# Altium PCB FPGA_Board.PcbDoc (part 2 of 10)
Units mm, origin at the board's own origin, x right, y up, seen from the top; angles counter-clockwise.
Board outline 103.63 x 86.08 mm, 2 copper layers (Top Layer, Bottom Layer); 109 components, 200 nets, 667 pads, 237 vias.
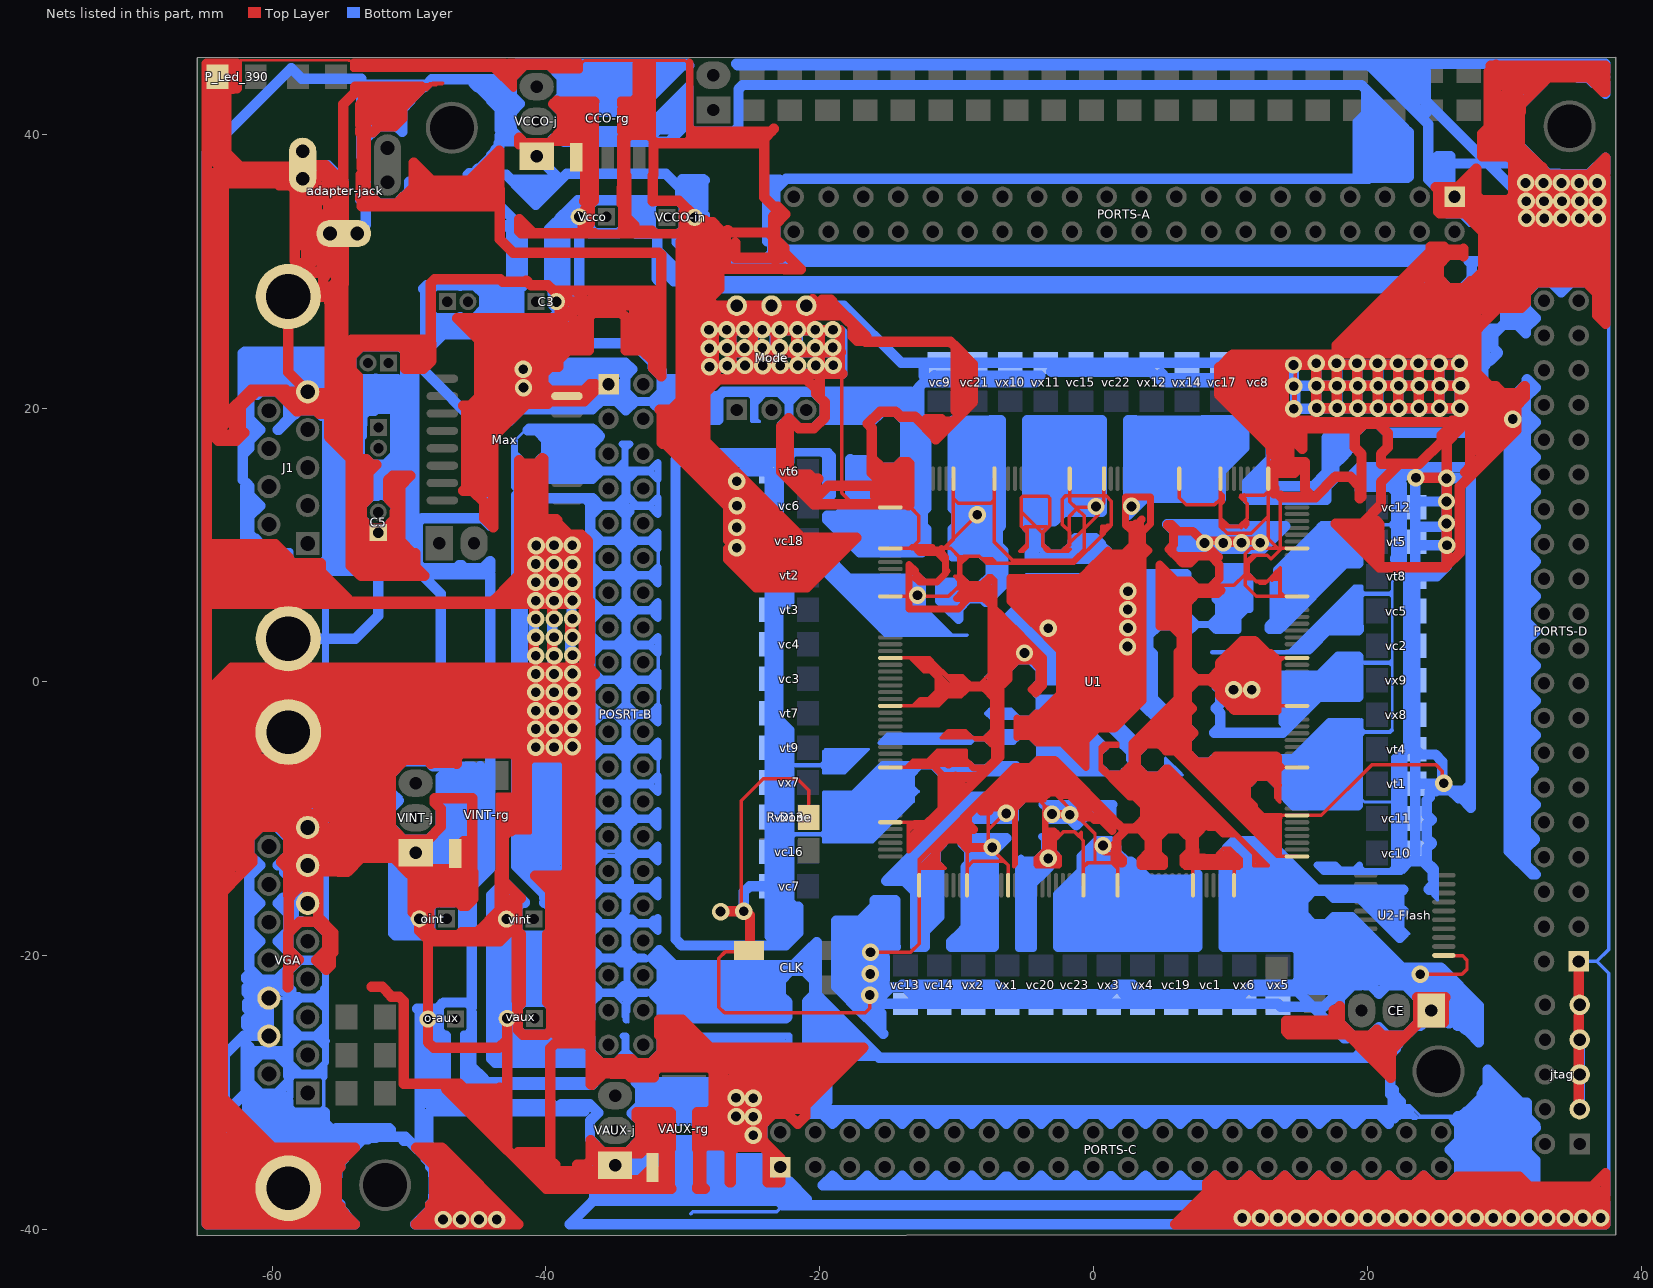
[diagram p2: the nets of this part, all layers, seen from the top]

## Via types
v1: diameter 1.27, hole 0.711, Top Layer to Bottom Layer, 237 vias

## Nets (pads, with @x,y where several pads share a name; then routed paths per layer and width w, separated by ;. In a path a pad name is that pad's centre, name@x,y a point inside that pad or via, vN(x,y) a via of type N, cw(c..) or ccw(c..) an arc to the next point about the centre after c; other vN are vias at no path point) (continued)
GND: adapter-jack.2 adapter-jack.2A adapter-jack.2B adapter-jack.3 adapter-jack.3A adapter-jack.3B C3.2 C5.1 CCO-rg.1 CE.1 CLK.2 J1.5 J1.10 J1.11 jtag.3 jtag.5 jtag.7 jtag.9 Max.15 Mode.4 Mode.5 Mode.6 o-aux.2 oint.2 P_Led_390.2 PORTS-A.1 PORTS-C.1 PORTS-D.1 POSRT-B.1 R-Done.2 U1.1 U1.8 U1.14 U1.25 U1.30 U1.41 U1.47 U1.53 U1.59 U1.66 U1.75 U1.82 U1.91 U1.99 U1.105 U1.112 U1.118 U1.129 U1.134 U1.145 U1.151 U1.157 U1.163 U1.170 U1.179 U1.186 U1.195 U1.202 U2-Flash.11 VAUX-j.1 VAUX-rg.1 vaux.2 vc1.2 vc2.2 vc3.2 vc4.2 vc5.2 vc6.2 vc7.2 vc8.2 vc9.2 vc10.2 vc11.2 vc12.2 vc13.2 vc14.2 vc15.2 vc16.2 vc17.2 vc18.2 vc19.2 vc20.2 vc21.2 vc22.2 vc23.2 VCCO-in.2 VCCO-j.1 Vcco.2 VGA.6 VGA.7 VGA.8 VGA.10 VGA.11 VGA.16 VGA.17 VINT-j.1 VINT-rg.1 vint.2 vt1.1 vt2.1 vt3.1 vt4.1 vt5.1 vt6.1 vt7.1 vt8.1 vt9.1 vx1.1 vx2.1 vx3.1 vx4.1 vx5.1 vx6.1 vx7.1 vx8.1 vx9.1 vx10.1 vx11.1 vx12.1 vx13.1 vx14.1 | length 14138.7
  Top Layer w0.203: -62.584,45.079 -62.258,45.405 -54.399,45.405 -54.365,45.372 -52.969,45.372 -52.863,45.266 -52.813,45.217 -52.782,45.185 ; -52.845,45.185 -52.782,45.185 ; -52.634,45.037 -52.782,45.185 ; -29.587,40.634 -29.516,40.705 -29.5,40.721 -29.479,40.721 -29.327,40.721 -29.327,44.109 -29.479,44.261 -29.516,44.298 -29.668,44.45 -29.668,45.213 -29.847,45.392 -37.193,45.392 -37.4,45.185 -37.536,45.185 -37.616,45.185 -37.914,45.185 -39.475,45.185 -41.921,45.185 -42.279,45.185 -42.36,45.185 -42.659,45.185 -42.975,45.185 -52.595,45.185 -52.782,45.185
  Top Layer w0.254: -64,39.475 -63.362,38.837 -62.4,37.875 -57.9,37.875 adapter-jack.2@-57.775,37.75 ; -48.716,43.26 -48.277,43.698 ; -48.688,43.489 -48.478,43.698 -48.277,43.698 ; -48.191,43.616 -48.01,43.616 -47.927,43.698 ; -41.095,-5.769 -41.13,-5.804 -41.13,-11.026 ; C3.2@-39.235,27.775 -39.235,26.566 -39.235,26.07 -39.235,25.899 -39.76,25.374 -40.458,24.676 -40.458,21.261 -40.458,21.225 -40.108,20.875 Max.15@-38.471,20.875 -37.257,20.875 -36.906,21.226 -36.382,21.75 POSRT-B.1@-35.429,21.75 ; -37.957,-6.219 -38.427,-6.219 -38.438,-6.208 -39.057,-5.589 -41.124,-5.589 -41.612,-5.589 -42.466,-5.589 -42.402,-5.653 -42.402,-10.218 -42.402,-10.753 ; Vcco.2@-37.575,33.975 -37.575,32.993 -37.361,32.779 -37.107,32.525 -29.667,32.525 -29.151,33.041 ; PORTS-C.1@-22.882,-35.435 -22.882,-35.229 -22.882,-35.07 -23.798,-34.154 -24.567,-33.385 -24.567,-31.918 -24.567,-31.704 -24.567,-31.163 -24.567,-30.992 -24.567,-30.864 -24.567,-30.479 -24.567,-29.981 -24.51,-29.924 -24.083,-29.497 -23.598,-29.012 -23.427,-28.841 -22.858,-28.272 -22.722,-28.136 -22.715,-28.129 ; R-Done.2@-20.805,-9.9 -20.805,-7.925 -21.649,-7.081 -24.119,-7.081 -25.732,-8.693 -25.732,-16.563 v1(-25.546,-16.749) -25.175,-17.12 CLK.2@-25.175,-19.625 -25.275,-19.725 -26.925,-19.725 -27.375,-20.175 -27.375,-23.75 -26.961,-24.164 -16.675,-24.164 -16.35,-23.839 v1(-16.35,-22.875) ; v1@-18.997,23.129 -18.997,23.122 -18.525,22.65 -18.375,22.5 -18.4,22.475 -18.4,14.323 -18.4,13.8 -17.561,12.961 -17.35,12.75 U1.53@-14.847,12.75 -13.375,12.75 -12.775,12.15 -12.775,10.3 -13.225,9.85 -13.225,9.834 -13.225,9.75 ; v1(-16.3,-19.75) -13.375,-19.75 -12.747,-19.122 U1.105@-12.747,-14.85 -12.727,-14.83 -12.727,-13.665 ; U1.99@-14.847,-10.25 -13.473,-10.25 ; U1.91@-14.847,-6.25 -13.729,-6.25 ; U1.82@-14.847,-1.75 -13.205,-1.75 ; U1.75@-14.847,1.75 -13.394,1.75 ; U1.66@-14.847,6.25 -13.49,6.25 -12.955,6.25 -10.6,6.25 -10.047,6.803 ; U1.59@-14.847,9.75 -13.375,9.75 -13.225,9.75 ; -12.886,9.457 -13.178,9.75 ; -11.742,-10.119 -11.873,-10.25 ; -10.698,-9.075 -10.823,-8.949 -10.823,-6.7 ; U1.47@-10.247,14.85 -10.247,13.397 ; -9.822,-7.07 -9.452,-6.7 ; -9.804,-5.955 -9.9,-5.859 -9.9,-5.707 ; -9.652,-7.501 -9.221,-7.07 -9.142,-6.991 -9.142,-6.7 ; -9.302,-5.005 -9.404,-5.005 ; -9.29,-5.005 -9.29,-5.17 ; U1.112@-9.247,-14.85 -9.247,-13.522 ; -9.189,-12.211 -9.758,-11.642 -11.424,-11.642 ; -8.975,-0.394 -9.357,-0.776 ; -8.886,-6.183 -9.115,-5.955 -9.29,-5.779 ; -8.558,-6.292 -8.685,-6.165 -8.725,-6.165 -9.29,-5.6 ; v1(-8.494,12.208) -10.247,10.455 ; -8.324,-6.209 -7.789,-6.209 -7.586,-6.209 -7.584,-6.209 ; -7.69,-4.2 -7.778,-4.112 ; -7.615,5.677 -7.618,5.674 -7.618,0.567 ; -7.479,-4.412 -7.656,-4.235 -7.9,-4.235 ; -7.46,-3.443 -7.46,-3.525 -8.025,-4.09 -8.825,-4.09 -9.152,-3.763 ; U1.41@-7.247,14.85 -7.247,13.625 -7.275,13.597 -7.275,13.275 ; -7.011,-5.937 -11.025,-9.95 ; -6.656,4.96 -7.15,5.453 ; v1(-6.387,-9.607) -6.504,-9.607 -7.7,-10.803 ; U1.118@-6.247,-14.85 -6.247,-13.403 -6.55,-13.1 ; -3.581,-8.677 -3.589,-8.685 -3.945,-8.685 ; v1@-3.333,-9.297 -3.618,-9.012 ; U1.30@-1.747,14.85 -1.747,13.586 ; U1.129@-0.747,-14.85 -0.747,-13.522 ; v1(0.174,12.808) 0.174,12.955 0.331,13.112 v1@0.331,12.75 ; v1(0.68,-11.954) 0.68,-12.465 0.756,-12.541 1.35,-12.541 ; U1.25@0.753,14.85 0.753,13.586 ; 1.326,-6.898 1.119,-6.898 ; 1.361,-7.314 0.945,-6.898 ; U1.134@1.753,-14.85 1.753,-13.628 1.35,-13.225 ; 2.167,-6.373 1.925,-6.615 1.125,-6.615 0.675,-6.165 ; 5.688,7.671 5.957,7.671 6.061,7.568 7.117,7.568 7.635,7.05 7.725,7.05 ; 6.145,-1.534 6.107,-1.496 6.107,-1.218 6.112,-1.218 6.145,-1.218 6.157,-1.218 6.475,-0.9 ; U1.14@6.253,14.85 6.253,13.447 6.775,12.925 8.825,12.925 9.253,13.353 ; 6.387,-13.36 6.387,-13.22 ; U1.145@7.253,-14.85 7.253,-13.727 ; 8.597,-9.512 8.854,-9.512 10.143,-10.801 ; 8.937,-5.398 8.694,-5.64 7.625,-5.64 6.869,-4.884 6.76,-4.775 6.564,-4.775 6.475,-4.775 ; 9.181,-1.015 9.181,-0.826 9.013,-0.658 ; U1.8@9.253,14.85 9.253,13.859 ; 9.864,-11.243 10.364,-11.243 ; 10.143,-10.789 10.143,-10.801 ; U1.151@10.253,-14.85 10.253,-13.719 ; 10.368,-2.293 13.057,-2.293 ; 10.445,-6.895 10.66,-7.11 11.35,-7.11 ; 10.651,-7.741 11.025,-8.115 11.106,-8.196 11.35,-8.44 ; 10.71,13.498 10.787,13.574 ; 11.003,13.671 10.952,13.62 ; 11.068,13.389 11.068,13.144 ; 11.096,11.308 11.259,11.471 11.259,11.731 10.775,11.247 10.775,11.26 10.65,11.385 ; 12.139,7.195 12.535,7.195 12.672,7.332 ; 12.305,-9.961 12.517,-9.75 ; 12.898,-9.88 12.979,-9.961 13.2,-10.182 ; 13.146,-6.684 13.146,-7.106 ; 13.834,6.339 13.623,6.551 ; v1(14.6,23.15) 14.725,23.025 v1@14.725,19.95 ; v1(14.625,21.6) 14.625,20.05 v1@14.725,19.95 ; U1.157@14.853,-12.75 13.4,-12.75 13.2,-12.55 13.2,-12.284 13.2,-11.668 ; U1.170@14.853,-6.25 13.58,-6.25 ; U1.179@14.853,-1.75 13.6,-1.75 ; U1.186@14.853,1.75 13.846,1.75 ; U1.195@14.853,6.25 11.875,6.25 11.075,7.05 11.075,7.875 ; U1.202@14.853,9.75 13.623,9.75 ; v1(23.85,-21.35) 26.902,-21.35 27.27,-20.982 27.27,-20.321 26.949,-20 25.6,-20 U2-Flash.11@25.575,-19.975 ; v1@25.475,-7.4 25.475,-6.525 25.016,-6.066 20.309,-6.066 16.625,-9.75 U1.163@14.853,-9.75 13.735,-9.75 ; PORTS-A.1@26.36,35.429 27.424,35.429 27.775,35.429 28.2,35.004 28.2,34.816 28.2,34.259 28.2,33.114 28.2,29.744 28.2,26.775 26.725,25.3 v1(26.725,23.275) ; jtag.7@35.5,-26.13 jtag.9@35.5,-23.59 ; -48.277,43.698 -48.233,43.743 -47.883,43.743 ; -48.277,43.698 -47.927,43.698 ; -47.927,43.698 -47.579,43.698 -47.535,43.743 -47.883,43.743 ; -47.927,43.698 -47.883,43.743 ; -42.402,-10.753 -42.25,-10.905 -41.251,-10.905 -41.13,-11.026 ; -42.402,-10.753 -42.539,-10.616 -42.539,-10.081 -42.539,-9.696 -42.539,-8.236 -42.555,-8.22 -43.56,-8.22 -43.56,-10.974 -43.491,-11.043 -43.298,-11.043 -42.861,-11.043 -42.456,-11.043 -42.439,-11.026 -41.13,-11.026 ; -13.729,-6.25 -13.186,-5.707 -12.994,-5.707 ; -13.729,-6.25 -13.654,-6.25 ; -13.654,-6.25 -13.359,-5.955 -13.242,-5.955 ; -13.654,-6.25 -13.537,-6.25 ; -13.545,-12.412 -11.383,-10.25 ; -13.545,-12.412 -13.487,-12.412 -11.325,-10.25 ; -13.545,-12.412 -13.545,-12.072 ; -13.545,-12.072 -11.777,-10.304 -11.777,-10.25 ; -13.545,-12.072 -13.545,-11.698 ; -13.545,-11.698 -13.545,-11.565 ; -13.545,-11.698 -13.321,-11.698 -11.873,-10.25 ; -13.545,-11.565 -13.497,-11.565 -12.266,-10.334 -12.182,-10.25 ; -13.545,-11.565 -13.545,-11.305 ; -13.545,-11.305 -12.574,-10.334 -12.49,-10.25 ; -13.545,-11.305 -13.545,-10.947 ; -13.545,-10.947 -12.932,-10.334 -12.848,-10.25 ; -13.545,-10.947 -13.545,-10.322 -13.473,-10.25 ; -13.537,-6.25 -11.569,-6.25 -11.475,-6.25 -11.025,-6.7 ; -13.537,-6.25 -13.242,-5.955 ; -13.473,-10.25 -13.391,-10.25 ; -13.394,1.75 -13.197,1.75 ; -13.394,1.75 -13.197,1.553 ; -13.391,-10.25 -13.099,-10.25 ; -13.391,-10.25 -13.412,-10.271 -13.412,-10.563 -13.099,-10.25 ; -13.242,-5.955 -12.994,-5.707 ; -13.225,9.75 -13.178,9.75 ; -13.205,-1.75 -11.525,-1.75 ; -13.205,-1.75 -12.68,-1.225 -12.42,-1.225 ; -13.197,1.553 -12.905,1.553 -12.078,0.726 ; -13.197,1.553 -13.197,1.75 ; -13.197,1.553 -12.37,0.726 -12.078,0.726 ; -13.197,1.75 -12.971,1.75 ; -13.178,9.75 -11.73,9.75 -11.116,9.75 -10.952,9.75 ; -13.099,-10.25 -12.848,-10.25 ; -12.994,-5.707 -12.114,-5.707 ; -12.971,1.75 -12.705,1.75 ; -12.971,1.75 -12.078,0.857 -12.078,0.726 ; -12.848,-10.25 -12.49,-10.25 ; -12.727,-13.665 -12.727,-13.313 ; -12.727,-13.665 -12.671,-13.609 -12.431,-13.609 ; -12.727,-13.313 -12.431,-13.609 ; -12.727,-13.313 -12.522,-13.313 -10.978,-11.769 -10.978,-11.675 ; -12.727,-13.313 -12.727,-13.177 ; -12.727,-13.177 -12.727,-12.945 -11.424,-11.642 ; -12.727,-13.177 -11.225,-11.675 -10.978,-11.675 ; -12.705,1.75 -11.843,0.888 -11.641,0.888 -12.385,1.632 -12.385,1.75 ; -12.705,1.75 -12.385,1.75 ; -12.598,-1.403 -11.59,-1.403 ; -12.598,-1.403 -12.42,-1.225 ; -12.598,-1.403 -12.776,-1.581 -11.768,-1.581 ; -12.49,-10.25 -12.182,-10.25 ; -12.431,-13.609 -11.974,-13.609 ; -12.42,-1.225 -12.06,-1.225 ; -12.385,1.75 -12.152,1.75 ; -12.182,-10.25 -12.155,-10.25 -11.873,-10.25 ; -12.152,1.75 -11.485,1.083 ; -12.152,1.75 -11.972,1.75 -11.485,1.263 ; -12.114,-5.707 -10.847,-5.707 -10.244,-5.707 ; -12.114,-5.707 -11.807,-5.401 ; -12.078,0.726 -11.935,0.726 ; -12.068,-13.515 -12.175,-13.408 -11.881,-13.408 -11.783,-13.31 ; -12.068,-13.515 -11.974,-13.609 ; -12.068,-13.515 -12.227,-13.515 -12.338,-13.404 -11.495,-12.561 ; -12.068,-13.515 -11.313,-13.515 ; -12.06,-1.225 -11.485,-0.65 ; -12.06,-1.225 -11.799,-1.225 ; -11.974,-13.609 -11.963,-13.62 -11.208,-13.62 ; -11.974,-13.609 -11.407,-13.609 -11.313,-13.515 ; -11.935,0.726 -11.485,0.726 ; -11.935,0.726 -11.485,0.276 ; -11.873,-10.25 -11.777,-10.25 ; -11.807,-5.401 -10.244,-5.401 ; -11.807,-5.401 -11.529,-5.122 ; -11.799,-1.225 -11.485,-1.225 ; -11.799,-1.225 -11.485,-0.911 ; -11.783,-13.31 -11.998,-13.31 -11.686,-12.998 -11.639,-12.998 -11.644,-13.003 -11.644,-13.171 -11.783,-13.31 ; -11.783,-13.31 -11.495,-13.31 -11.495,-12.561 ; -11.777,-10.25 -11.383,-10.25 ; -11.768,-1.581 -11.469,-1.581 ; -11.768,-1.581 -11.59,-1.403 ; -11.59,-1.403 -11.485,-1.297 ; -11.59,-1.403 -11.485,-1.403 ; -11.529,-5.122 -10.244,-5.122 ; -11.529,-5.122 -11.412,-5.005 -9.9,-5.005 ; -11.525,-1.75 -11.3,-1.75 ; -11.525,-1.75 -11.413,-1.638 ; -11.495,-12.561 -11.495,-12.551 -11.467,-12.523 -11.467,-12.533 -11.495,-12.561 ; -11.485,-1.403 -11.485,-1.297 ; -11.485,-1.403 -11.412,-1.403 ; -11.485,-1.403 -11.485,-1.565 -11.469,-1.581 ; -11.485,-1.297 -11.485,-1.225 ; -11.485,-1.297 -11.412,-1.225 ; -11.485,-1.225 -11.485,-0.911 ; -11.485,-1.225 -11.412,-1.225 ; -11.485,-0.911 -11.485,-0.65 ; -11.485,-0.65 -11.485,0.276 ; -11.485,0.276 -11.485,0.474 ; -11.485,0.474 -11.24,0.23 ; -11.485,0.474 -11.485,0.726 ; -11.485,0.726 -10.911,0.153 ; -11.485,0.726 -11.485,1.083 ; -11.485,1.083 -10.4,-0.002 ; -11.485,1.083 -11.485,1.263 ; -11.485,1.263 -10.689,0.468 ; -11.469,-1.581 -11.412,-1.637 ; -11.424,-11.642 -7.932,-8.15 -7.662,-8.15 -7.6,-8.15 -6.35,-8.15 ; -11.412,-1.637 -11.198,-1.423 ; -11.412,-1.637 -11.412,-1.403 ; -11.412,-1.637 -11.3,-1.75 ; -11.412,-1.403 -11.218,-1.403 -11.198,-1.423 ; -11.412,-1.403 -11.412,-1.352 -11.286,-1.225 ; -11.412,-1.225 -11.228,-1.041 ; -11.412,-1.225 -11.286,-1.225 ; -11.383,-10.25 -11.325,-10.25 ; -11.325,-10.25 -11.025,-9.95 ; -11.313,-13.515 -11.275,-13.553 ; -11.313,-13.515 -11.313,-13.152 ; -11.313,-13.152 -10.912,-13.553 ; -11.313,-13.152 -11.313,-12.383 -10.605,-11.675 ; -11.3,-1.75 -10.643,-1.093 ; -11.286,-1.225 -11.165,-1.104 ; -11.275,-13.553 -11.208,-13.62 ; -11.275,-13.553 -10.912,-13.553 ; -11.24,0.23 -11.165,0.154 -11.165,-0.804 ; -11.24,0.23 -11.24,-1.029 -11.228,-1.041 ; -11.228,-1.041 -11.165,-0.978 ; -11.228,-1.041 -11.165,-1.104 ; -11.208,-13.62 -10.845,-13.62 -10.912,-13.553 ; -11.198,-1.423 -10.4,-0.625 ; -11.165,-1.104 -11.165,-0.978 ; -11.165,-1.104 -10.4,-0.339 ; -11.165,-0.978 -11.165,-0.804 ; -11.165,-0.804 -10.911,-0.55 ; -11.025,-9.95 -11.025,-9.648 -11.025,-9.402 -11.025,-6.7 ; -11.025,-6.7 -10.823,-6.7 ; -10.978,-11.675 -10.605,-11.675 ; -10.952,9.75 -10.875,9.75 ; -10.952,9.75 -10.247,10.455 ; -10.911,-0.55 -10.623,-0.262 ; -10.911,-0.55 -10.911,-0.262 ; -10.911,-0.262 -10.623,-0.262 ; -10.911,-0.262 -10.911,0.153 ; -10.911,0.153 -10.56,-0.199 ; -10.897,-3.843 -11.145,-4.091 -8.787,-4.091 ; -10.897,-3.843 -10.636,-3.582 ; -10.897,-3.843 -10.375,-3.843 ; -10.875,9.75 -10.247,10.378 -10.247,10.455 ; -10.875,9.75 -10.45,9.75 -9.825,9.125 ; -10.823,-6.7 -10.677,-6.7 ; -10.689,0.468 -10.447,0.225 -10.4,0.225 ; -10.689,0.468 -9.587,0.468 -9.019,-0.1 ; -10.677,-6.7 -10.458,-6.7 ; -10.677,-6.7 -10.677,-8.54 -10.648,-8.569 -10.458,-8.379 -10.458,-6.7 ; -10.643,-1.093 -10.4,-0.85 -10.4,-0.625 ; -10.643,-1.093 -10.1,-1.093 ; -10.636,-3.582 -10.375,-3.843 ; -10.636,-3.582 -10.321,-3.582 ; -10.623,-0.262 -10.56,-0.199 ; -10.605,-11.675 -9.975,-11.675 -9.247,-12.403 -9.247,-13.522 ; -10.56,-0.199 -10.42,-0.339 -10.4,-0.339 ; -10.458,-6.7 -9.452,-6.7 ; -10.4,-0.625 -10.4,-0.339 ; -10.4,-0.339 -10.4,-0.002 ; -10.4,-0.002 -10.4,0.225 ; -10.4,0.225 -9.54,0.225 -9.455,0.14 -9.835,0.14 -10.075,-0.1 ; -10.4,0.225 -10.075,-0.1 ; -10.375,-3.843 -10.177,-3.843 ; -10.321,-3.582 -9.916,-3.582 ; -10.321,-3.582 -10.118,-3.785 ; -10.247,10.455 -10.247,13.397 ; -10.247,13.397 -9.9,13.05 -7.5,13.05 -7.275,13.275 ; -10.244,-5.707 -10.244,-5.506 -10.244,-5.401 ; -10.244,-5.707 -9.9,-5.707 ; -10.244,-5.401 -10.244,-5.122 ; -10.244,-5.401 -9.9,-5.401 ; -10.244,-5.122 -9.9,-5.122 ; -10.177,-3.843 -10.06,-3.843 ; -10.177,-3.843 -10.118,-3.785 ; -10.118,-3.785 -10.06,-3.843 ; -10.118,-3.785 -9.916,-3.582 ; -10.1,-1.093 -9.674,-1.093 ; -10.1,-1.093 -9.783,-0.776 ; -10.075,-0.1 -9.269,-0.1 -9.019,-0.1 ; -10.06,-3.843 -9.791,-3.843 ; -10.047,6.803 -9.252,6.803 ; -10.047,6.803 -9.85,7 ; -9.916,-3.582 -9.672,-3.582 ; -9.9,-5.707 -9.362,-5.707 ; -9.9,-5.707 -9.9,-5.506 -9.9,-5.401 ; -9.9,-5.401 -9.669,-5.401 ; -9.9,-5.401 -9.9,-5.122 ; -9.9,-5.122 -9.635,-5.122 ; -9.9,-5.122 -9.9,-5.005 ; -9.9,-5.005 -9.542,-5.005 ; -9.85,7 -9.85,7.401 ; -9.85,7 -9.449,7 ; -9.85,7.401 -9.449,7 ; -9.85,7.401 -9.85,7.705 ; -9.85,7.401 -10.154,7.705 -9.85,7.705 ; -9.85,7.705 -9.715,7.705 ; -9.85,7.705 -9.715,7.57 ; -9.85,7.705 -9.85,8.49 ; -9.85,8.49 -9.715,8.625 ; -9.85,8.49 -9.85,9.1 -9.825,9.125 ; -9.825,9.125 -9.551,9.125 ; -9.791,-3.843 -9.53,-3.582 ; -9.791,-3.843 -9.269,-3.843 ; -9.791,-3.843 -9.791,-3.701 -9.672,-3.582 ; -9.783,-0.776 -9.357,-0.776 ; -9.783,-0.776 -9.674,-0.886 -9.674,-1.093 ; -9.715,7.57 -9.715,7.705 ; -9.715,7.57 -9.145,7 ; -9.715,7.705 -9.595,7.705 ; -9.715,7.705 -9.715,7.825 ; -9.715,7.825 -9.595,7.705 ; -9.715,7.825 -9.715,8.625 ; -9.715,8.625 -9.215,9.125 ; -9.715,8.625 -9.715,8.728 ; -9.715,8.728 -9.318,9.125 ; -9.715,8.728 -9.715,8.961 -9.551,9.125 ; -9.674,-1.093 -9.357,-0.776 ; -9.672,-3.582 -9.53,-3.582 ; -9.669,-5.401 -9.563,-5.506 -9.362,-5.707 ; -9.669,-5.401 -9.632,-5.401 ; -9.635,-5.122 -9.494,-5.263 -9.632,-5.401 ; -9.635,-5.122 -9.425,-5.122 ; -9.632,-5.401 -9.339,-5.401 -9.29,-5.449 ; -9.595,7.705 -9.15,7.26 ; -9.551,9.125 -9.318,9.125 ; -9.551,9.125 -9.486,9.19 -9.253,9.19 ; -9.542,-5.005 -9.425,-5.122 ; -9.542,-5.005 -9.455,-5.005 ; -9.53,-3.582 -9.333,-3.582 -9.152,-3.763 ; -9.53,-3.582 -9.269,-3.843 ; -9.455,-5.005 -9.338,-5.122 ; -9.455,-5.005 -9.404,-5.005 ; -9.452,-6.7 -9.142,-6.7 ; -9.449,7 -9.145,7 ; -9.449,7 -9.252,6.803 ; -9.425,-5.122 -9.29,-5.257 ; -9.425,-5.122 -9.338,-5.122 ; -9.404,-5.005 -9.338,-5.071 -9.338,-5.122 ; -9.362,-5.707 -9.29,-5.779 ; -9.338,-5.122 -9.29,-5.17 ; -9.318,9.125 -9.215,9.125 ; -9.318,9.125 -9.253,9.19 ; -9.29,-5.779 -9.29,-5.6 ; -9.29,-5.6 -9.29,-5.449 ; -9.29,-5.449 -9.29,-5.257 ; -9.29,-5.257 -9.29,-5.17 ; -9.269,-3.843 -9.152,-3.96 -9.152,-3.763 ; -9.253,9.19 -9.15,9.19 ; -9.252,6.803 -8.742,6.803 -8.453,6.803 ; -9.247,-13.522 -8.825,-13.1 -6.55,-13.1 ; -9.215,9.125 -9.15,9.19 ; -9.15,7.26 -8.91,7.26 ; -9.15,7.26 -8.89,7 ; -9.15,9.19 -8.35,9.19 -8.144,8.984 ; -9.145,7 -8.89,7 ; -9.142,-6.7 -8.323,-6.7 -8.077,-6.7 -8.075,-6.7 -7.584,-6.209 ; -9.019,-0.1 -8.285,-0.1 ; -8.91,7.26 -8.662,7.26 ; -8.91,7.26 -8.65,7 ; -8.89,7 -8.65,7 ; -8.787,-4.091 -7.8,-4.091 -7.778,-4.112 ; -8.787,-4.091 -8.644,-4.235 -7.9,-4.235 ; -8.662,7.26 -8.385,7.26 ; -8.662,7.26 -7.335,5.932 ; -8.65,7 -8.453,6.803 ; -8.453,6.803 -7.335,5.684 ; -8.385,7.26 -8.194,7.26 ; -8.385,7.26 -7.759,6.633 ; -8.285,-0.1 -7.618,0.567 ; -8.285,-0.1 -8.225,-0.1 ; -8.225,-0.1 -7.876,-0.449 -7.175,-1.15 -7.175,-1.241 -7.175,-2.55 -7.175,-4.716 -7.175,-5.798 -7.175,-5.8 -7.584,-6.209 ; -8.225,-0.1 -7.925,-0.1 -7.618,0.207 ; -8.194,7.26 -7.711,7.743 -7.595,7.743 ; -8.194,7.26 -8.105,7.26 ; -8.144,8.984 -7.909,8.984 ; -8.144,8.984 -7.817,8.657 ; -8.105,7.26 -7.727,6.882 ; -8.105,7.26 -7.856,7.26 ; -7.909,8.984 -7.405,8.984 -7.229,8.808 -7.666,8.808 -7.817,8.657 ; -7.909,8.984 -7.817,8.892 -7.817,8.657 ; -7.9,-4.235 -7.778,-4.112 ; -7.856,7.26 -7.711,7.405 -7.567,7.405 ; -7.856,7.26 -7.727,7.26 ; -7.817,8.657 -1.414,8.657 ; -7.759,6.633 -7.619,6.773 ; -7.759,6.633 -7.335,6.209 ; -7.727,6.882 -7.727,7.26 ; -7.727,6.882 -7.619,6.773 ; -7.727,7.26 -7.422,7.26 ; -7.727,7.26 -7.43,6.962 ; -7.7,-10.803 -7.7,-9.5 -7.639,-9.439 -7.358,-9.158 -7.194,-8.995 ; -7.7,-10.803 -7.7,-11.95 -7.562,-12.088 -6.55,-13.1 ; -7.618,0.207 -7.618,0.567 ; -7.618,0.207 -7.345,0.48 -7.15,0.675 -7.15,5.211 -7.15,5.453 ; -7.618,0.567 -7.345,0.84 -7.335,0.851 -7.335,5.027 -7.335,5.396 -7.335,5.684 ; -7.619,6.773 -7.43,6.962 ; -7.619,6.773 -7.335,6.489 ; -7.595,7.743 -7.194,7.342 ; -7.595,7.743 -7.439,7.743 -7.194,7.497 ; -7.567,7.405 -7.398,7.405 -7.516,7.523 -7.685,7.523 -7.567,7.405 ; -7.567,7.405 -7.422,7.26 ; -7.43,6.962 -7.194,7.198 ; -7.43,6.962 -7.202,6.735 ; -7.43,6.962 -7.335,6.867 -7.335,6.489 ; -7.422,7.26 -7.194,7.26 ; -7.335,5.684 -7.15,5.5 ; -7.335,5.684 -7.335,5.932 ; -7.335,5.932 -7.335,6.209 ; -7.335,6.209 -7.335,6.489 ; -7.275,13.275 -7.275,10.25 -5.925,8.9 -1.5,8.9 -1.414,8.986 ; -7.202,6.735 -7.194,6.743 -7.194,7.198 ; -7.202,6.735 -7.15,6.735 ; -7.194,-8.995 -7.131,-8.931 -6.708,-8.508 ; -7.194,-8.995 -6.939,-8.995 -6.775,-9.158 v1@-6.708,-9.225 ; -7.194,7.198 -7.192,7.2 -7.192,7.26 ; -7.194,7.198 -7.194,7.26 ; -7.194,7.26 -7.194,7.342 ; -7.194,7.26 -7.192,7.26 ; -7.194,7.342 -7.194,7.497 ; -7.194,7.342 -7.15,7.298 ; -7.194,7.497 -7.15,7.453 -7.15,7.298 ; -7.192,7.26 -7.15,7.218 ; -7.15,5.453 -7.15,5.5 ; -7.15,5.5 -7.15,6.735 ; -7.15,6.735 -7.15,7.218 ; -7.15,7.218 -7.15,7.298 ; v1@-6.708,-9.225 -6.437,-9.496 -6.437,-9.158 -6.437,-8.931 -6.437,-8.579 -6.259,-8.401 ; v1@-6.708,-9.225 -6.708,-9.158 -6.708,-8.931 -6.708,-8.508 ; -6.708,-8.508 -6.601,-8.401 ; -6.601,-8.401 -6.259,-8.401 ; -6.6,-8.401 -6.582,-8.382 -6.35,-8.15 ; -6.35,-8.15 -2.85,-8.15 -1.344,-9.656 0.1,-11.1 0.1,-13.225 ; -6.259,-8.401 -6.248,-8.401 ; -6.259,-8.401 -6.248,-8.39 -6.248,-8.401 ; -6.248,-8.401 -6.06,-8.401 ; -6.248,-8.401 -6.248,-8.931 -6.248,-9.133 -6.248,-9.314 -6.074,-9.488 -6.074,-8.931 -6.074,-8.893 -6.074,-8.415 -6.06,-8.401 ; -6.06,-8.401 -6.041,-8.382 -6.016,-8.357 ; -6.06,-8.401 -5.972,-8.401 ; -6.016,-8.357 -5.991,-8.382 -5.972,-8.401 ; -6.016,-8.357 -5.952,-8.293 -5.088,-8.293 ; -5.972,-8.401 -5.868,-8.505 ; -5.972,-8.401 -5.868,-8.401 -5.659,-8.401 -5.645,-8.415 -5.645,-8.505 ; -5.868,-8.505 -5.868,-8.687 -5.868,-8.931 -5.868,-9.259 -5.868,-9.488 -5.665,-9.285 ; -5.868,-8.505 -5.645,-8.505 ; -5.665,-9.325 -5.665,-13.328 -5.82,-13.483 -5.82,-9.48 -5.665,-9.325 ; -5.665,-9.325 -5.665,-9.285 ; -5.665,-9.325 -5.025,-8.685 -3.945,-8.685 ; -5.665,-9.285 -5.645,-9.265 ; -5.645,-9.265 -5.645,-9.036 -5.645,-8.931 -5.645,-8.505 ; -5.645,-9.265 -5.088,-8.708 -5.088,-8.505 ; -5.645,-8.505 -5.114,-8.505 -5.088,-8.505 ; -5.29,12.421 -5.29,13.451 -5.187,13.554 -3.334,13.554 -3.204,13.424 -3.204,11.425 -3.715,10.914 ; -5.29,12.421 -5.29,11.355 -4.835,10.9 ; -5.29,12.421 -4.205,11.336 ; -5.088,-8.505 -5.088,-8.494 -5.088,-8.293 ; -5.088,-8.505 -3.959,-8.505 ; -5.088,-8.293 -3.259,-8.293 -3.471,-8.505 -3.959,-8.505 ; -4.835,10.1 -4.835,10.9 ; -4.835,10.1 -4.835,9.845 -5.145,9.535 -5.4,9.535 -4.835,10.1 ; -4.835,10.9 -4.835,11.164 -5.007,11.336 -4.205,11.336 ; -4.205,11.336 -3.46,11.336 -3.395,11.271 -3.715,10.951 -3.715,10.914 ; -4.205,11.336 -3.715,10.846 ; -3.959,-8.505 -3.959,-8.671 -3.945,-8.685 ; -3.945,-8.685 -3.618,-9.012 ; -3.715,10.1 -3.15,9.535 ; -3.715,10.1 -3.715,10.846 ; -3.715,10.1 -3.715,9.905 -3.52,9.71 -3.52,9.65 -3.405,9.535 -3.15,9.535 ; -3.715,10.846 -3.715,10.914 ; -3.618,-9.012 -3.618,-11.377 -3.583,-11.412 -3.583,-12.173 -4.266,-12.856 -4.266,-13.404 -4.183,-13.487 -2.507,-13.487 -2.446,-13.426 -2.446,-12.749 -2.815,-12.38 -2.815,-11.55 -2.225,-10.96 -1.375,-10.96 -1.03,-11.305 ; -3.15,9.535 -2.35,9.535 ; -2.35,9.535 -1.785,10.1 ; -2.35,9.535 -1.856,9.535 -1.699,9.692 -2.071,9.692 -1.787,9.976 -1.731,9.976 -1.731,10.154 ; -1.785,10.1 -1.785,10.99 ; -1.785,10.1 -1.731,10.154 ; -1.785,10.99 -1.785,12.079 -1.219,12.644 ; -1.785,10.99 -1.731,10.936 -1.731,10.154 ; -1.785,10.99 -2.29,11.495 -2.29,13.354 -2.058,13.586 -1.747,13.586 ; -1.747,13.586 0.753,13.586 ; -1.747,13.586 -1.747,13.172 -1.325,12.75 ; -1.731,10.154 -0.7,11.185 ; -1.414,8.657 0.551,10.623 ; -1.414,8.657 -1.414,8.986 ; -1.414,8.986 -0.7,9.7 -0.7,11.185 ; -1.325,12.75 v1@0.331,12.75 ; -1.325,12.75 -1.219,12.644 ; -1.219,12.644 -0.7,12.125 -0.7,11.185 ; -1.03,-11.305 -0.94,-11.395 ; -1.03,-11.305 -1.03,-11.117 -0.891,-10.978 -0.891,-11.345 -0.94,-11.395 ; -0.94,-11.395 -0.747,-11.588 -0.747,-13.522 ; -0.747,-13.522 -0.45,-13.225 0.1,-13.225 ; -0.7,11.185 0.331,12.216 v1@0.331,12.75 ; 0.1,-13.225 1.35,-13.225 ; v1@0.331,12.75 0.4,12.75 0.753,13.103 0.753,13.586 ; 0.482,-5.328 0.482,-6.436 0.675,-6.628 ; 0.482,-5.328 0.56,-5.25 ; 0.482,-5.328 0.482,-4.739 0.739,-4.482 1.761,-4.482 ; 0.551,10.623 0.551,10.987 0.607,11.043 ; 0.551,10.623 0.61,10.681 ; 0.56,-5.25 0.56,-6.05 0.675,-6.165 ; 0.56,-5.25 0.56,-5.188 0.696,-5.052 ; 0.56,-5.25 0.696,-5.114 ; 0.607,11.043 0.607,11.369 0.612,11.364 0.928,11.364 ; 0.607,11.043 0.928,11.364 ; 0.607,11.043 0.607,10.684 0.61,10.681 ; 0.61,10.681 0.76,10.831 0.76,10.9 ; 0.61,10.681 0.61,10.75 0.76,10.9 ; 0.675,-6.628 0.945,-6.898 ; 0.675,-6.628 0.675,-6.454 ; 0.675,-6.454 1.119,-6.898 ; 0.675,-6.454 0.675,-6.165 ; 0.696,-5.114 0.696,-5.052 ; 0.696,-5.114 1.125,-4.685 1.558,-4.685 ; 0.696,-5.052 0.696,-4.841 0.952,-4.585 0.986,-4.619 1.129,-4.619 0.696,-5.052 ; 0.753,13.586 0.919,13.586 1.296,13.209 1.296,11.54 1.192,11.436 ; 0.76,10.9 1.192,11.332 ; 0.928,11.364 1.12,11.364 1.192,11.436 ; 0.928,11.364 1,11.436 1.192,11.436 ; 0.945,-6.898 1.119,-6.898 ; 1.192,11.332 1.192,11.436 ; 1.192,11.332 1.296,11.436 1.192,11.436 ; 1.35,-13.225 1.35,-12.541 ; 1.35,-12.541 1.35,-11.775 2.425,-10.7 3.048,-10.7 3.846,-10.7 4.669,-10.7 6.175,-10.7 6.219,-10.744 6.605,-11.13 ; 1.558,-4.685 1.761,-4.482 ; 1.558,-4.685 1.761,-4.685 1.761,-4.482 ; 6.387,-13.22 6.484,-13.317 ; 6.387,-13.22 6.387,-12.999 ; 6.387,-13.22 6.484,-13.22 ; 6.387,-12.999 6.484,-12.999 ; 6.387,-12.999 6.387,-12.703 ; 6.387,-12.703 6.646,-12.703 ; 6.387,-12.703 6.827,-12.262 ; 6.475,-4.775 6.52,-4.82 8.25,-6.55 8.735,-6.55 11.55,-6.55 ; 6.475,-4.775 6.475,-4.304 6.475,-3.546 6.475,-3.032 6.475,-0.9 ; 6.475,-0.9 6.475,-0.625 ; 6.475,-0.625 6.145,-0.955 2.675,-4.425 2.675,-6.134 2.675,-6.575 2.871,-6.771 3.075,-6.975 3.516,-6.975 3.941,-6.975 4.265,-6.975 4.85,-6.975 6.789,-8.914 ; 6.475,-0.625 6.869,-0.231 7.026,-0.074 ; 6.484,-13.317 6.484,-13.457 6.647,-13.62 6.871,-13.62 ; 6.484,-13.317 6.568,-13.317 ; 6.484,-13.317 6.484,-13.22 ; 6.484,-13.22 6.484,-12.999 ; 6.484,-13.22 7.001,-13.22 7.039,-13.182 ; 6.484,-12.999 6.799,-12.999 6.827,-12.971 ; 6.484,-12.999 6.78,-12.703 ; 6.568,-13.317 6.843,-13.317 7.146,-13.62 ; 6.568,-13.317 6.871,-13.62 ; 6.605,-11.13 6.605,-11.046 6.605,-9.098 6.619,-9.084 6.789,-8.914 ; 6.605,-11.13 6.827,-11.352 ; 6.646,-12.703 6.827,-12.522 ; 6.646,-12.703 6.78,-12.703 ; 6.78,-12.703 6.827,-12.656 ; 6.789,-8.914 7.462,-9.587 7.462,-9.84 7.462,-10.223 7.462,-10.403 ; 6.827,-12.971 6.827,-12.656 ; 6.827,-12.971 7.039,-13.182 ; 6.827,-12.656 6.827,-12.522 ; 6.827,-12.656 6.895,-12.589 ; 6.827,-12.522 6.895,-12.589 ; 6.827,-12.522 6.827,-12.262 ; 6.827,-12.262 6.827,-11.352 ; 6.827,-11.352 7.039,-11.563 ; 6.871,-13.62 7.146,-13.62 ; 6.895,-12.589 7.039,-12.733 ; 7.026,-0.074 7.417,-0.074 8.429,-0.074 ; 7.026,-0.074 7.175,0.075 ; 7.039,-13.182 7.253,-13.397 ; 7.039,-13.182 7.039,-12.733 ; 7.039,-12.733 7.253,-12.947 ; 7.039,-12.733 7.039,-11.563 ; 7.039,-11.563 7.315,-11.84 ; 7.146,-13.62 7.253,-13.727 ; 7.175,0.075 6.953,0.297 6.7,0.55 6.7,6.025 6.84,6.165 7.545,6.87 7.725,7.05 ; 7.175,0.075 9.07,0.075 9.676,0.075 10.105,0.075 10.739,0.075 10.898,0.075 11.675,0.075 11.975,0.075 12.093,0.193 12.629,0.729 12.898,0.998 13.2,1.3 ; 7.253,-13.727 7.253,-13.62 ; 7.253,-13.62 7.253,-13.397 ; 7.253,-13.62 10.166,-13.62 10.253,-13.533 ; 7.253,-13.397 7.389,-13.533 10.253,-13.533 ; 7.253,-13.397 7.435,-13.215 ; 7.253,-13.397 7.253,-12.947 ; 7.253,-13.397 10.022,-13.397 10.172,-13.247 ; 7.253,-12.947 7.253,-11.902 ; 7.253,-12.947 7.385,-13.079 7.385,-12.034 7.253,-11.902 ; 7.253,-11.902 7.315,-11.84 ; 7.315,-11.84 7.462,-11.987 ; 7.435,-13.215 7.539,-13.111 ; 7.435,-13.215 10.14,-13.215 ; 7.462,-11.987 7.462,-11.193 ; 7.462,-11.987 7.56,-12.085 ; 7.462,-11.193 7.462,-11.153 7.462,-11.016 ; 7.462,-11.193 7.56,-11.096 ; 7.462,-11.016 7.56,-10.919 ; 7.462,-11.016 7.462,-10.5 ; 7.462,-10.5 7.56,-10.598 ; 7.462,-10.5 7.462,-10.403 ; 7.462,-10.403 7.56,-10.5 7.56,-10.598 ; 7.539,-13.111 7.6,-13.05 ; 7.539,-13.111 10.036,-13.111 ; 7.56,-12.165 7.56,-12.333 7.6,-12.373 ; 7.56,-12.165 7.56,-12.085 ; 7.56,-12.165 7.6,-12.205 7.6,-12.373 ; 7.56,-12.085 7.56,-11.096 ; 7.56,-11.096 7.56,-11.056 7.56,-10.919 ; 7.56,-11.096 8.253,-10.403 8.213,-10.403 8.076,-10.403 7.56,-10.919 ; 7.56,-10.919 7.56,-10.598 ; 7.6,-13.05 7.75,-12.9 9.825,-12.9 ; 7.6,-13.05 7.6,-12.671 ; 7.6,-12.671 7.6,-12.373 ; 7.6,-12.671 8.106,-12.671 8.125,-12.69 8.925,-12.69 ; 7.725,7.05 8.684,7.05 10.25,7.05 11.075,7.875 ; 8.429,-0.074 8.597,-0.074 9.181,-0.658 ; 8.429,-0.074 9.013,-0.658 ; 8.925,-12.69 9.615,-12.69 9.825,-12.9 ; 8.925,-12.69 9.154,-12.461 ; 9.013,-0.658 9.181,-0.658 ; 9.154,-12.461 9.458,-12.157 ; 9.154,-12.461 9.719,-12.461 10.352,-13.094 ; 9.181,-0.658 10.313,-1.79 10.674,-2.151 13.2,-2.151 ; 9.253,11.676 9.253,11.347 9.75,10.85 11.5,10.85 12.753,12.103 ; 9.253,11.676 9.253,13.353 ; 9.253,11.676 9.582,11.347 9.582,11.322 10.587,11.322 10.65,11.385 ; 9.253,13.353 9.253,13.859 ; 9.253,13.859 9.472,13.64 9.472,13.124 9.285,12.937 9.285,11.95 9.85,11.385 10.65,11.385 ; 9.458,-12.157 10.419,-13.118 10.661,-13.118 ; 9.458,-12.157 9.812,-12.157 ; 9.812,-12.157 9.812,-12.269 10.661,-13.118 ; 9.812,-12.157 9.986,-12.157 10.796,-12.967 ; 9.825,-12.9 10.036,-13.111 ; 10.036,-13.111 10.14,-13.215 ; 10.14,-13.215 10.172,-13.247 ; 10.143,-10.801 12.772,-13.43 12.465,-13.43 ; 10.143,-10.801 10.014,-10.93 9.892,-11.052 10.136,-11.052 10.174,-11.052 10.364,-11.243 ; 10.172,-13.247 10.253,-13.328 10.253,-13.533 ; 10.253,-13.719 10.352,-13.62 ; 10.253,-13.719 10.253,-13.533 ; 10.352,-13.62 10.641,-13.62 ; 10.352,-13.62 10.352,-13.471 ; 10.352,-13.471 10.541,-13.283 ; 10.352,-13.471 10.352,-13.094 ; 10.352,-13.094 10.541,-13.283 ; 10.364,-11.243 11.71,-12.589 ; 10.541,-13.283 10.641,-13.383 10.641,-13.62 ; 10.541,-13.283 10.661,-13.162 10.661,-13.118 ; 10.641,-13.62 10.796,-13.465 10.796,-12.967 ; 10.65,11.385 11.215,11.95 11.215,12.997 11.068,13.144 ; 10.661,-13.118 10.661,-13.102 10.796,-12.967 ; 10.787,13.574 10.741,13.62 10.832,13.62 ; 10.787,13.574 10.832,13.62 ; 10.787,13.574 10.796,13.565 10.796,13.416 ; 10.796,13.416 11,13.62 ; 10.796,13.416 11.068,13.144 ; 10.832,13.62 10.952,13.62 ; 10.952,13.62 11,13.62 ; 11,13.62 12.452,13.62 12.596,13.764 12.753,13.764 ; 11.075,7.875 11.075,8.135 ; 11.075,8.135 11.31,7.9 ; 11.075,8.135 11.075,9.35 11.475,9.75 13.45,9.75 ; 11.31,7.9 11.399,7.812 ; 11.31,7.9 11.31,8.7 ; 11.31,8.7 11.31,8.951 11.624,9.265 11.875,9.265 ; 11.31,8.7 11.875,9.265 ; 11.35,-8.44 11.35,-8.824 11.35,-9.006 11.35,-9.35 11.75,-9.75 ; 11.35,-8.44 11.35,-7.327 11.35,-7.11 ; 11.35,-8.44 11.36,-8.45 11.36,-8.657 12.411,-9.707 13.692,-9.707 13.735,-9.75 ; 11.35,-7.11 11.35,-6.895 11.35,-6.75 11.476,-6.624 11.55,-6.55 ; 11.35,-7.11 11.567,-7.11 12.992,-7.11 13.067,-7.185 ; 11.399,7.812 11.253,7.666 11.253,7.516 11.694,7.516 ; 11.399,7.812 11.694,7.516 ; 11.55,-6.55 11.85,-6.25 13.58,-6.25 ; 11.694,7.516 11.875,7.335 ; 11.71,-12.589 11.71,-13.444 11.724,-13.43 12.465,-13.43 ; 11.71,-12.589 12.142,-13.02 12.142,-13.107 ; 11.75,-9.75 11.75,-10.218 13.2,-11.668 ; 11.75,-9.75 12.094,-9.75 12.517,-9.75 ; 11.875,7.335 11.878,7.332 12.672,7.332 ; 11.875,7.335 12.675,7.335 ; 11.875,9.265 12.675,9.265 12.938,9.002 12.981,9.002 13.638,9.659 13.623,9.674 13.623,9.75 ; 12.142,-13.107 12.465,-13.43 ; 12.142,-13.107 11.861,-12.826 11.861,-13.131 11.985,-13.255 12.142,-13.255 12.142,-13.107 ; 12.517,-9.75 13.485,-9.75 ; 12.672,7.332 12.675,7.335 ; 12.675,7.335 13.24,7.9 ; 12.753,12.103 12.753,13.764 ; 12.753,12.103 12.753,10.447 13.45,9.75 ; 12.753,13.764 U1.1@12.753,14.85 12.753,16.818 12.964,17.029 13.664,17.729 14.725,18.79 v1@14.725,19.95 ; 12.753,13.764 13.183,13.764 13.586,13.764 13.625,13.725 13.625,13.584 13.625,12.966 13.623,12.964 13.623,9.75 ; 13.057,-2.293 13.491,-2.293 13.598,-2.186 ; 13.057,-2.293 13.2,-2.151 ; 13.067,-7.185 13.067,-7.452 13.291,-7.676 13.291,-8.473 13.421,-8.602 ; 13.067,-7.185 13.068,-7.184 13.137,-7.115 13.146,-7.106 ; 13.067,-7.185 13.07,-7.185 13.206,-7.185 13.421,-7.185 ; 13.115,7.509 13.422,7.509 13.435,7.522 13.435,7.611 ; 13.115,7.509 13.081,7.509 13.013,7.441 13.047,7.441 13.115,7.509 ; 13.115,7.509 13.326,7.72 13.435,7.611 ; 13.146,-7.106 13.206,-7.046 13.218,-7.034 13.421,-7.034 ; 13.2,-11.668 13.2,-11.255 13.2,-10.955 13.2,-10.182 ; 13.2,-10.182 13.2,-10.075 13.505,-9.77 13.485,-9.75 ; 13.2,-2.151 13.598,-1.752 ; 13.2,-2.151 13.563,-2.151 13.598,-2.186 ; 13.2,1.3 13.2,-1.35 13.35,-1.5 13.598,-1.748 ; 13.2,1.3 13.367,1.467 13.65,1.75 13.846,1.75 ; 13.24,7.9 13.24,7.969 13.623,8.351 13.623,8.283 ; 13.24,7.9 13.623,8.283 ; 13.421,-8.602 13.421,-7.536 13.421,-7.185 ; 13.421,-8.602 13.611,-8.793 13.611,-6.281 13.58,-6.25 ; 13.421,-7.185 13.429,-7.185 13.58,-7.034 ; 13.421,-7.185 13.421,-7.034 ; 13.421,-7.034 13.421,-6.68 13.58,-6.521 ; 13.421,-7.034 13.58,-7.034 ; 13.435,7.611 13.599,7.447 ; 13.435,7.611 13.435,7.932 13.599,7.768 13.599,7.447 ; 13.45,9.75 13.623,9.75 ; 13.485,-9.75 13.735,-9.75 ; 13.58,-7.034 13.58,-6.521 ; 13.58,-6.521 13.58,-6.25 ; 13.598,-2.186 13.598,-1.752 ; 13.598,-1.752 13.598,-1.748 ; 13.598,-1.752 13.6,-1.75 ; 13.598,-1.748 13.6,-1.75 ; 13.598,-1.748 13.598,1.502 13.846,1.75 ; 13.599,7.447 13.599,6.424 13.623,6.448 13.623,6.551 ; 13.599,7.447 13.623,7.423 ; 13.623,6.551 13.623,7.423 ; 13.623,7.423 13.623,8.283
  Top Layer w0.305: jtag.9@35.433,-23.59 jtag.9@35.5,-23.59
  Top Layer w0.508: -52.845,45.185 -52.813,45.217 -52.764,45.266 -52.863,45.266 -54.068,45.266 -54.068,44.784 -43.833,44.784 ; -52.634,45.037 -52.423,44.826 -43.875,44.826 -43.833,44.784 ; -49.09,43.489 -48.688,43.489 ; -42.659,45.185 -42.74,45.266 -42.279,45.266 ; -42.36,45.185 -42.279,45.266 ; -41.921,45.185 -41.921,44.91 -42.047,44.784 ; -39.475,45.185 -39.285,44.995 -38.104,44.995 -37.914,45.185 -37.833,45.266 ; -36.455,32.779 -29.746,32.779 -29.701,32.824 -29.701,33.977 -30.069,34.345 -30.069,33.111 -30.337,32.843 -31.965,32.843 -32.209,33.087 -33.266,33.087 -33.435,33.256 -33.435,33.4 -34.017,33.982 -34.017,37.017 -34.086,37.086 -34.086,39.564 -33.818,39.832 -32.54,39.832 ; -34.341,37.212 -34.341,34.941 -34.493,34.789 ; -34.252,33.683 -33.802,33.233 -33.802,33.12 ; -33.715,33.033 -33.802,33.12 ; -32.272,39.383 -32.272,39.564 ; -31.699,39.467 -31.94,39.467 -32.208,39.735 -32.208,45.188 -32.272,45.124 -32.272,39.564 ; -29.389,40.311 -29.516,40.438 -29.516,40.705 -29.516,44.298 -29.516,45.266 -29.479,45.229 -29.479,44.261 -29.479,40.721 -29.479,40.581 -29.211,40.313 -28.889,40.313 ; -13.242,-5.955 -10.599,-5.955 -9.804,-5.955 -9.115,-5.955 ; -13.225,9.834 -11.815,9.834 -11.73,9.75 -11.448,9.467 ; -13.099,-10.334 -12.932,-10.334 -12.574,-10.334 -12.266,-10.334 -12.24,-10.334 -12.155,-10.25 -11.742,-9.837 ; v1@-12.955,6.25 v1(-12.866,6.339) ; -12.86,9.611 -12.716,9.467 -11.448,9.467 ; -11.569,-6.25 -11.133,-6.686 -11.133,-9.227 -11.341,-9.436 ; -11.116,9.75 -11.116,9.444 ; -8.886,-6.183 -8.777,-6.292 -8.558,-6.292 -7.873,-6.292 -7.789,-6.209 -7.38,-5.8 -7.177,-5.8 ; -8.742,6.803 -8.449,6.51 ; -8.323,-6.7 -8.738,-7.115 ; -7.966,-0.449 -7.876,-0.449 -6.992,-0.449 ; -7.925,-0.1 -7.59,-0.1 -7.441,0.049 ; -6.759,-5.505 -7.055,-5.8 -7.175,-5.8 -7.177,-5.8 ; -6.746,4.87 -6.511,4.635 ; -6.003,1.253 -6.759,0.497 ; -5.591,-4.071 -5.502,-3.983 -5.394,-3.983 ; -5.591,-3.903 -5.474,-3.903 ; -4.568,-0.562 -4.227,-0.222 ; v1@-3.333,-9.297 -3.533,-9.497 -3.533,-12.302 -3.722,-12.492 v1@-3.722,-12.609 ; v1(-3.324,-12.891) v1@-3.302,-12.913 ; v1(-3.32,3.911) -2.646,3.911 ; -2.631,2.407 -2.491,2.267 -2.491,-0.842 -3.925,-2.276 ; -2.364,-0.895 -3.746,-2.276 -3.925,-2.276 ; -1.784,3.566 -1.939,3.721 ; v1(2.769,12.818) 2.769,12.765 2.337,12.333 ; -43.833,44.784 -42.385,43.336 -42.385,44.084 -41.685,44.784 ; -43.833,44.784 -43.397,44.784 ; -43.397,44.784 -43.692,45.079 -52.489,45.079 -52.595,45.185 -52.676,45.266 -42.975,45.266 -42.975,45.185 -42.975,44.91 -42.849,44.784 ; -43.397,44.784 -42.722,44.109 -42.047,44.784 ; -43.397,44.784 -42.849,44.784 ; -42.849,44.784 -42.786,44.721 -42.553,44.721 -42.49,44.784 ; -42.849,44.784 -42.49,44.784 ; -42.49,44.784 -42.279,44.995 -42.279,45.185 -42.279,45.266 ; -42.49,44.784 -42.047,44.784 ; -42.279,45.266 -37.833,45.266 ; -42.047,44.784 -41.685,44.784 ; -41.685,44.784 -41.532,44.937 -39.824,44.937 ; -39.824,44.937 -37.863,44.937 -37.616,45.185 -37.536,45.264 ; -39.824,44.937 -39.569,44.682 -37.536,44.682 -37.536,45.185 -37.536,45.264 ; -37.833,45.266 -37.535,45.266 -37.536,45.264 ; -34.493,34.789 -34.493,33.161 -34.534,33.12 -33.802,33.12 ; -34.493,34.789 -34.578,34.874 -34.578,36.139 -34.553,36.164 -34.553,38.497 -34.556,38.5 -34.556,39.838 -34.399,39.838 -34.309,39.928 -34.556,40.175 -34.556,41.83 -34.365,41.83 -34.219,41.684 -34.219,40.318 -34.024,40.123 -33.869,40.123 -33.764,40.228 -33.805,40.269 -33.805,42.107 -34.532,42.107 -34.556,42.131 -34.556,42.518 -33.69,42.518 -33.422,42.786 -33.422,45.156 -33.414,45.148 -33.414,40.131 -33.382,40.163 -32.943,40.163 -32.959,40.179 -32.959,45.204 -32.69,45.204 -32.54,45.054 -32.54,39.832 ; -32.54,39.832 -32.272,39.564 ; -12.679,7.609 -12.352,7.283 ; -12.679,7.609 -12.992,7.923 -12.992,8.091 -13.49,8.589 -13.49,6.25 -13.49,5.334 -9.878,5.334 -9.279,5.933 -9.279,6.096 ; -12.679,7.609 -13.054,7.609 -12.728,7.283 -12.352,7.283 ; -12.352,7.283 -11.448,7.283 -10.808,7.923 -10.808,7.988 ; -11.742,-10.119 -11.496,-10.119 -11.025,-9.648 -8.077,-6.7 -7.586,-6.209 -7.177,-5.8 ; -11.742,-10.119 -11.341,-9.718 ; -11.742,-10.119 -11.742,-9.837 ; -11.742,-9.837 -11.341,-9.436 ; -11.448,9.467 -11.116,9.136 ; -11.448,9.467 -11.139,9.467 -11.116,9.444 ; -11.341,-9.718 -11.025,-9.402 -10.698,-9.075 -10.084,-8.46 ; -11.341,-9.718 -11.341,-9.436 ; -11.116,9.136 -10.808,8.827 ; -11.116,9.136 -11.116,9.444 ; -11.116,9.444 -10.808,9.136 -10.808,8.827 ; -10.808,7.988 -10.808,8.19 ; -10.808,7.988 -10.707,8.089 -10.808,8.19 ; -10.808,8.19 -10.808,8.827 ; -10.084,-8.46 -9.652,-8.029 ; -10.084,-8.46 -10.084,-6.809 -9.822,-7.07 ; -9.822,-7.07 -9.221,-7.07 -8.783,-7.07 -8.738,-7.115 ; -9.822,-7.07 -9.652,-7.24 -9.652,-7.501 -9.652,-8.029 ; -9.652,-8.029 -8.738,-7.115 ; -9.279,6.096 -8.035,6.096 ; -9.279,6.096 -10.03,6.096 -9.616,6.51 -8.449,6.51 ; -8.449,6.51 -8.035,6.096 ; -8.035,6.096 -7.615,5.677 -7.335,5.396 -7.15,5.211 ; -7.441,0.049 -7.345,0.145 ; -7.441,0.049 -7.345,-0.047 ; -7.345,-0.047 -7.345,0.145 ; -7.345,-0.047 -6.759,-0.047 ; -7.345,0.145 -7.345,0.48 -7.345,0.84 -7.345,5.016 -7.335,5.027 -7.15,5.211 ; -7.345,0.145 -7.148,0.342 ; -7.177,-5.8 -7.175,-5.798 -7.169,-5.792 -6.759,-5.382 -6.759,-1.054 ; -7.15,5.211 -7.148,5.209 ; -7.148,0.342 -7.148,5.209 ; -7.148,0.342 -6.759,-0.047 ; -7.148,5.209 -6.759,4.82 -6.759,1.05 ; -6.992,-0.449 -6.759,-0.682 ; -6.992,-0.449 -6.992,-0.821 -6.759,-1.054 ; -6.759,-1.054 -6.759,-0.682 ; -6.759,-0.682 -6.759,-0.383 ; -6.759,-0.383 -6.55,-0.173 ; -6.759,-0.383 -6.759,-0.047 ; -6.759,-0.047 -6.759,0.497 ; -6.759,0.497 -6.759,1.05 ; -6.759,0.497 -6.55,0.287 -6.55,-0.173 ; -6.759,1.05 -6.671,1.05 -6.489,1.232 -6.511,1.254 -6.511,1.504 ; -6.55,-0.173 -6.192,0.184 -6.192,0.902 -5.591,1.504 ; -6.511,1.504 -6.094,1.921 ; -6.511,1.504 -6.511,4.635 ; -6.511,1.504 -5.652,1.504 ; -6.511,4.635 -6.094,4.218 ; -6.109,5.885 -6.109,6.211 ; -6.109,5.885 -1.145,5.885 -0.908,5.649 ; -6.109,5.885 -5.524,5.301 ; -6.109,6.211 -6.109,6.5 ; -6.109,6.211 -5.842,6.211 ; -6.109,6.5 -5.82,6.789 0.232,6.789 ; -6.109,6.5 -6.109,6.869 ; -6.109,6.869 -5.94,7.037 0.48,7.037 ; -6.109,6.869 -6.109,7.307 ; -6.109,7.307 -6.109,7.616 -0.983,7.616 ; -6.109,7.307 0.048,7.307 0.357,7.616 ; -6.094,1.921 -6.094,3.536 ; -6.094,1.921 -5.822,1.921 ; -6.094,3.536 -6.094,4.218 ; -6.094,3.536 -5.612,3.054 ; -6.094,4.218 -5.612,3.735 ; -5.842,6.211 -5.622,6.431 -0.126,6.431 ; -5.842,6.211 -0.346,6.211 ; -5.822,1.921 -5.822,2.52 ; -5.822,1.921 v1@-5.235,1.921 ; -5.822,2.52 -5.33,2.52 -4.863,2.987 ; -5.822,2.52 -5.822,2.843 -5.612,3.054 ; -5.652,1.504 -5.591,1.504 ; -5.652,1.504 v1@-5.235,1.921 ; -5.612,3.054 -5.612,3.735 ; -5.612,3.054 -5.545,2.987 -4.863,2.987 ; -5.612,3.735 -4.863,2.987 ; -5.591,-3.094 -5.591,-3.786 -5.474,-3.903 ; -5.591,-3.094 -5.591,-2.629 -5.527,-2.692 -5.189,-2.692 ; -5.591,-3.094 -5.189,-2.692 ; -5.591,1.504 -5.552,1.542 ; -5.552,1.542 -4.478,1.542 ; -5.552,1.542 -5.046,2.049 v1(-5.046,2.11) ; -5.524,5.301 -5.176,5.649 -0.908,5.649 ; -5.524,5.301 -4.498,4.274 ; -5.474,-3.903 -5.394,-3.983 ; -5.394,-3.983 -4.598,-3.983 -4.119,-4.461 -2.363,-4.461 ; v1@-5.235,1.921 v1(-5.046,2.11) ; -5.189,-2.692 -4.623,-2.692 ; v1(-5.046,2.11) -4.655,2.11 -3.659,1.114 ; v1(-5.046,2.11) -4.478,1.542 ; -4.863,2.987 -3.659,1.783 -3.659,1.114 ; -4.789,5.07 -4.57,5.07 -4.425,4.925 ; -4.789,5.07 -5.067,5.348 -1.558,5.348 -1.383,5.173 ; -4.789,5.07 -4.644,4.925 ; -4.644,4.925 -4.425,4.925 ; -4.644,4.925 -4.204,4.485 -4.165,4.485 ; -4.623,-2.692 -4.341,-2.692 -3.925,-2.276 ; -4.623,-2.692 -4.207,-2.276 -3.925,-2.276 ; -4.498,4.274 -4.376,4.274 -4.165,4.485 ; -4.498,4.274 -4.26,4.036 ; -4.478,1.542 -4.008,1.072 -4.008,-0.002 ; -4.425,4.925 -3.725,4.925 ; -4.26,4.036 -2.718,2.494 ; -4.26,4.036 -3.982,4.036 v1@-3.533,4.485 ; -4.227,-0.876 -4.469,-0.634 -4.497,-0.634 -4.227,-0.364 ; -4.227,-0.876 -3.659,-0.308 -3.659,1.114 ; -4.227,-0.876 -4.227,-0.441 ; -4.227,-0.441 -4.227,-0.364 ; -4.227,-0.441 -4.008,-0.222 ; -4.227,-0.364 -4.085,-0.222 -4.008,-0.222 ; -4.227,-0.364 -4.227,-0.222 ; -4.227,-0.222 -4.008,-0.002 ; -4.165,4.485 -3.725,4.925 ; -4.165,4.485 v1@-3.533,4.485 ; -4.008,-0.222 -4.008,-0.002 ; -3.725,4.925 -3.314,4.925 ; v1@-3.722,-12.609 -3.459,-12.346 -3.459,-12.766 -3.722,-13.029 v1@-3.722,-12.609 ; v1@-3.722,-12.609 -4.067,-12.954 -4.067,-13.314 v1@-3.302,-13.314 ; v1@-3.533,4.485 -2.874,4.485 ; v1@-3.533,4.485 -3.204,4.815 ; -3.314,4.925 -2.392,4.925 ; -3.314,4.925 -3.204,4.815 ; v1@-3.302,-13.314 v1@-3.302,-12.913 ; v1@-3.302,-13.314 -3.077,-13.314 -3.054,-13.291 v1@-3.054,-13.161 ; v1@-3.302,-12.913 -3.302,-11.656 ; v1@-3.302,-12.913 v1@-3.054,-13.161 ; -3.302,-11.656 -3.302,-10.883 -2.882,-10.883 ; -3.302,-11.656 -2.882,-11.236 -2.882,-10.883 ; -3.204,4.815 -2.874,4.485 ; v1@-3.054,-13.161 -3.054,-12.391 v1@-2.917,-12.528 ; v1@-2.917,-12.528 -2.917,-12.994 -2.709,-13.202 -2.656,-13.149 -2.656,-12.789 v1@-2.917,-12.528 ; v1@-2.917,-12.528 -2.917,-11.473 -2.724,-11.279 -2.724,-11.041 -2.882,-10.883 ; -2.874,4.485 -2.655,4.266 -2.436,4.485 ; -2.874,4.485 -2.436,4.485 ; -2.718,2.494 -2.203,2.494 -2.003,2.694 -1.882,2.815 3.409,8.106 ; -2.718,2.494 -2.003,3.209 3.409,8.621 ; -2.646,3.911 -2.347,3.911 ; -2.646,3.911 -1.632,4.925 ; -2.436,4.485 -2.392,4.529 -2.392,4.925 ; -2.392,4.925 -1.632,4.925 ; -2.363,-4.461 -0.559,-6.265 -0.559,-4.308 ; -2.363,-4.461 -1.774,-4.461 ; -2.347,3.494 -2.801,3.494 -3.037,3.258 -2.937,3.258 -2.737,3.058 -2.529,3.058 -2.347,3.24 -2.347,3.494 ; -2.347,3.494 -2.165,3.494 -1.939,3.721 ; -2.347,3.494 -2.347,3.911 ; -2.347,3.911 -2.347,4.02 -1.442,4.925 ; -2.347,3.911 -2.129,3.911 ; -2.129,3.911 -1.939,3.721 ; -2.129,3.911 0.171,6.211 ; -1.939,3.721 3.391,9.05 3.409,9.032 3.409,8.621 ; -1.774,-4.461 -0.712,-4.461 ; -1.774,-4.461 -1.415,-4.82 ; -1.632,4.925 -1.442,4.925 ; -1.632,4.925 -1.383,5.173 ; -1.442,4.925 -0.814,5.553 ; -1.415,-4.82 -0.822,-5.413 -0.822,-4.819 ; -1.415,-4.82 -0.823,-4.82 -0.822,-4.819 ; -1.383,5.173 -0.908,5.649 ; -0.983,7.616 -0.562,8.037 ; -0.983,7.616 0.357,7.616 ; -0.908,5.649 -0.346,6.211 ; -0.908,5.649 -0.814,5.553 ; -0.822,-4.819 -0.822,-4.571 -0.712,-4.461 ; -0.814,5.553 -0.156,6.211 ; -0.712,-4.461 -0.559,-4.308 ; -0.562,8.037 -0.33,8.269 ; -0.562,8.037 -0.099,8.037 0.133,8.269 ; -0.559,-4.308 0.308,-3.441 1.54,-3.441 3.591,-1.39 3.591,8.288 ; -0.346,6.211 -0.156,6.211 ; -0.346,6.211 -0.126,6.431 ; -0.33,8.269 0.637,9.235 ; -0.33,8.269 0.133,8.269 ; -0.156,6.211 0.171,6.211 ; -0.156,6.211 0.064,6.431 ; -0.126,6.431 0.064,6.431 ; -0.126,6.431 0.232,6.789 ; 0.064,6.431 0.422,6.789 ; 0.133,8.269 0.195,8.269 ; 0.133,8.269 0.868,9.004 ; 0.171,6.211 3.429,9.469 3.429,11.718 3.522,11.811 3.522,11.917 3.117,11.512 ; 0.195,8.269 0.586,8.269 0.922,8.605 1.149,8.605 1.085,8.669 0.586,8.669 0.586,8.66 0.195,8.269 ; 0.195,8.269 -0.086,7.988 -0.013,7.915 0.85,7.915 1.939,9.004 ; 0.232,6.789 0.422,6.789 ; 0.232,6.789 0.48,7.037 ; 0.357,7.616 0.613,7.616 0.836,7.393 ; 0.422,6.789 0.931,7.298 ; 0.48,7.037 0.836,7.393 ; 0.637,9.235 0.868,9.004 ; 0.637,9.235 1.041,9.64 1.273,9.408 ; 0.836,7.393 0.931,7.298 ; 0.836,7.393 2.447,9.004 ; 0.868,9.004 1.031,9.004 ; 0.931,7.298 3.173,9.54 2.983,9.54 2.447,9.004 ; 1.031,9.004 1.031,9.166 1.273,9.408 ; 1.031,9.004 1.939,9.004 ; 1.273,9.408 2.177,9.408 2.817,10.048 ; 1.939,9.004 2.447,9.004 ; 2.337,12.333 2.337,13.493 4.149,13.493 4.149,11.519 3.676,11.046 ; 2.337,12.333 2.337,11.432 2.685,11.085 ; 2.685,11.085 2.817,10.952 ; 2.685,11.085 2.685,11.505 2.951,11.505 ; 2.817,10.048 2.817,9.59 3.176,9.949 3.176,11.452 3.117,11.512 ; 2.817,10.048 2.817,10.952 ; 2.817,10.952 2.817,11.371 2.951,11.505 ; 2.951,11.505 3.044,11.598 3.044,11.584 3.117,11.512 ; 2.951,11.505 3.11,11.505 3.117,11.512 ; 3.409,8.106 3.409,8.621 ; 3.409,8.106 3.591,8.288 ; 3.409,8.621 3.583,8.795 3.583,10.048 ; 3.583,10.048 3.583,10.952 ; 3.583,10.048 4.027,9.603 3.591,9.167 3.591,8.288 ; 3.583,10.952 3.583,11.046 3.676,11.139 3.676,11.046 ; 3.583,10.952 3.676,11.046